# Altium PCB Control - 副本.PcbDoc
Units mm, origin at the board's own origin, x right, y up, seen from the top; angles counter-clockwise.
Board outline 140 x 70 mm, 2 copper layers (Top Layer, Bottom Layer); 25 components, 42 nets, 140 pads, 76 vias.
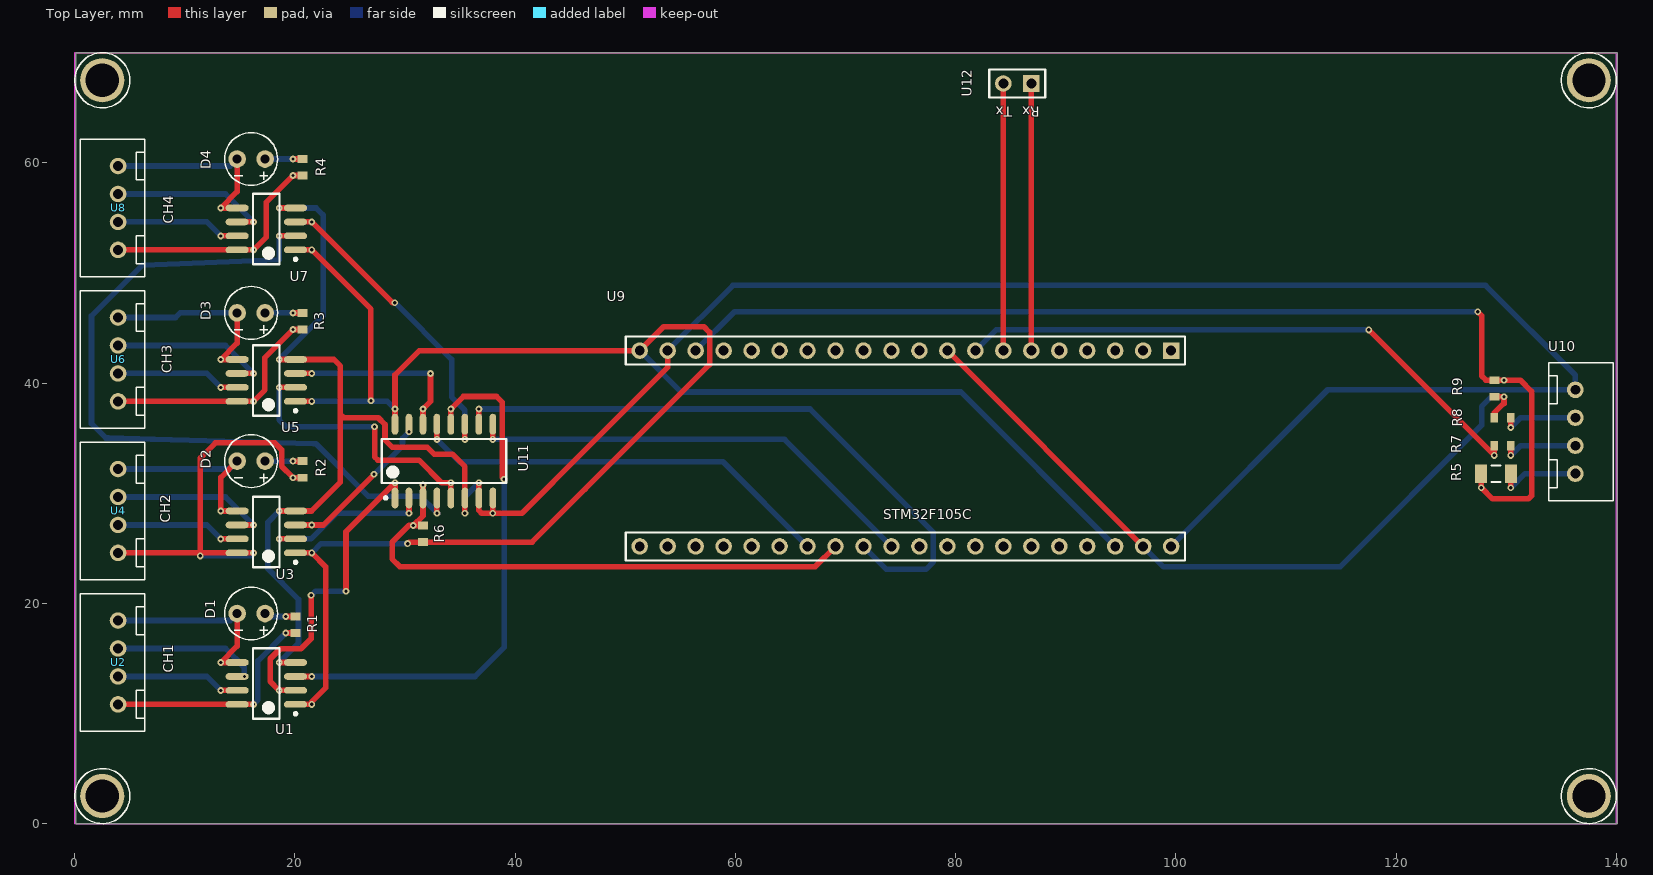
[diagram p0: Top Layer view]
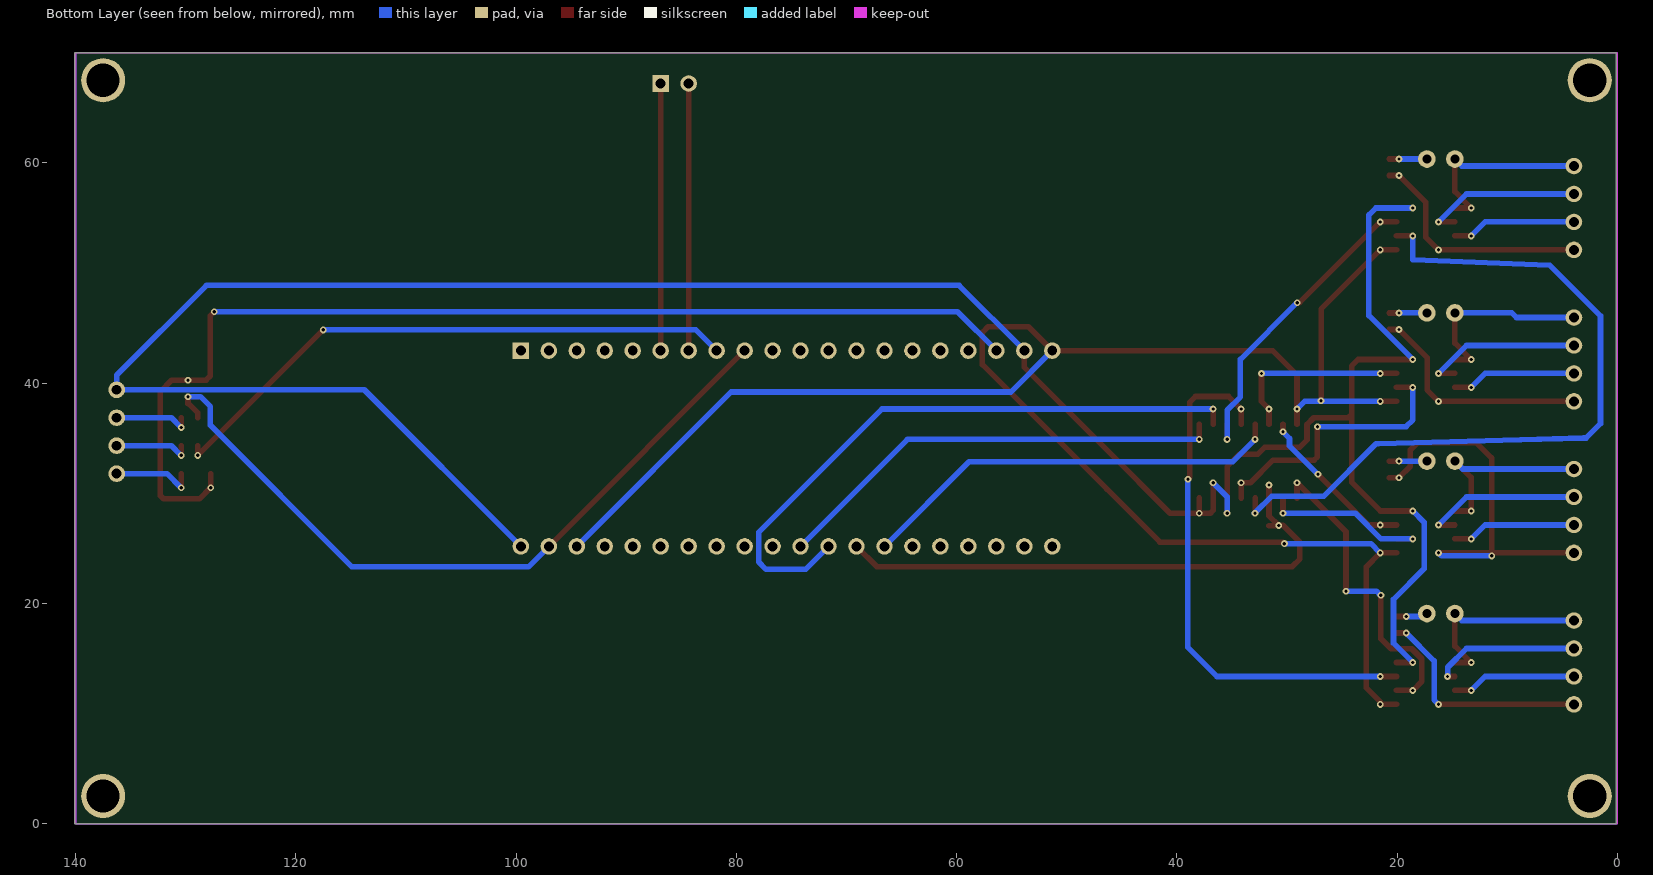
[diagram p1: Bottom Layer view, seen from below]

## Layer stack, top to bottom
Top Solder: solder mask 0.0102, Solder Resist, Dk 3.5
Top Layer: signal copper 0.0356
Dielectric 1: dielectric 0.32, FR-4, Dk 4.8
Bottom Layer: signal copper 0.0356
Bottom Solder: solder mask 0.0102, Solder Resist, Dk 3.5

## Board outline
140.081,70 140.081,0 0.081,0 0.081,70

## Design rules (kind name [scope] priority, off if disabled: settings)
Clearance Clearance_1 [WithinRoom('RoomDefinition1') or   WithinRoom('RoomDefinition2') vs WithinRoom('RoomDefinition1') or   WithinRoom('RoomDefinition2')] p1: gap=0.254 ignorepadtopadclearanceinfootprint=TRUE
Clearance [Not( WithinRoom('RoomDefinition1')  or WithinRoom('RoomDefinition2') ) vs Not( WithinRoom('RoomDefinition1')  or WithinRoom('RoomDefinition2') )] p2: gap=1.016 ignorepadtopadclearanceinfootprint=TRUE except(0.254: Arc-THPad Arc-Hole Track-THPad Track-Hole SMDPad-THPad SMDPad-Hole THPad-THPad THPad-Via THPad-Fill THPad-Poly THPad-Region THPad-Text THPad-Hole Via-Hole Fill-Hole Poly-Hole Region-Hole Text-Hole)
ComponentClearance [All] p1: gap=0.254 collisioncheckmode=3 verticalgap=0 showdistances=TRUE donotcheckwithout3dbody=TRUE checkcomponentboundary=TRUE
HoleSize [All] p1: absolutevalues=TRUE maxlimit=3 minlimit=0.025 maxpercent=80.000 minpercent=20.000
PolygonConnect [All] p1: connectstyle=Relief reliefconductorwidth=0.254 reliefentries=4 polygonreliefangle="90 Angle" airgapwidth=0.254
RoomDefinition RoomDefinition2 [False] p1: confinementstyle=ConfineIn formatcopy=TRUE lockcomponents=FALSE outline 132.207,42.822 132.207,28.217 125.603,28.217 125.603,42.822
RoomDefinition RoomDefinition1 [False] p2: confinementstyle=ConfineIn formatcopy=TRUE lockcomponents=FALSE outline 46.355,65.047 46.355,5.611 8.763,5.611 8.763,65.047
RoutingVias [All] p1: holewidth=0.305 width=0.61 viastyle="Through Hole" minholewidth=0.305 minwidth=0.61 maxholewidth=0.305 maxwidth=0.61
SMDEntry [All] p1: side=FALSE corner=FALSE anyangle=FALSE
SolderMaskExpansion [All] p1: expansion=0.102 istentingtop=FALSE
SupplyNets "Schematic Supply Nets_1" [InNet('+5')] p1: voltage=0.000
SupplyNets "Schematic Supply Nets" [InNet('GND')] p2: voltage=0.000
Width [All] p1: maxlimit=1 minlimit=0.254 preferedwidth=0.508
28 further rules are at their usual default settings.

## Components (designator, comment, footprint, x,y, rotation, side; value= is the part's Value field where it differs from the comment)
D1 "CN0" LED 16.019,19.073 r270 top
D2 "CN2" LED 16.019,32.916 r270 top
D3 "CN1" LED 16.019,46.378 r270 top
D4 "CN3" LED 16.019,60.348 r270 top
R1 "" RESC1608L 20.049,18.057 r270 top value=1K
R2 "" RESC1608L 20.701,32.166 r270 top value=1K
R3 "" RESC1608L 20.701,45.616 r270 top value=1K
R4 "" RESC1608L 20.701,59.598 r270 top value=1K
R5 "500mA Fuse" RESC3216L 129.067,31.773 r180 top value=0R
R6 "" RESC1608L 31.623,26.312 r270 top value=10K
R7 "" RESC1608L 129.667,34.313 r0 top value=20R
R8 "" RESC1608L 129.667,36.853 r0 top value=20R
R9 "" RESC1608L 128.917,39.52 r270 top value=1.5K
U1 "ISO6721B" SOP127P636-8L 17.399,12.723 r180 top
U2 "SERIAL4P" X254-4P 3.937,14.628 r270 top
U3 "ISO6721B" SOP127P636-8L 17.399,26.481 r180 top
U4 "SERIAL4P" X254-4P 3.937,28.386 r270 top
U5 "ISO6721B" SOP127P636-8L 17.399,40.24 r180 top
U6 "SERIAL4P" X254-4P 3.937,42.145 r270 top
U7 "ISO6721B" SOP127P636-8L 17.399,53.998 r180 top
U8 "SERIAL4P" X254-4P 3.937,55.903 r270 top
U9 "STM32F103CCORE" STM32F103C 99.568,42.949 r180 top
U10 "USB-X254" X254-4P 136.271,35.583 r90 top
U11 "74HC4052" SOP127P762-16L 33.528,32.916 r90 top
U12 "CTLDBG" CTLDBG 86.868,67.206 r180 top

## Footprints (in the part's own frame and the unit in brackets; to place one, negate y for a bottom-side part, rotate by r counter-clockwise, add the part's x,y. Pads: shape width x height; smd on the part's side, far side on the other; paste and mask are expansions set on the pad)
CTLDBG [mm]
  rect 1.5x1.5 hole 0.9: 1(0,0)
  round 1.5 hole 0.9: 2(2.54,0)
  silkscreen extent -1.27,-1.27 3.81,1.27
LED [mm] "LED; 2 Leads"
  round 1.6 hole 0.8: 1(0,1.27) 2(0,-1.27)
  silkscreen extent -2.4,-2.4 2.4,2.4
RESC1608L [mm] "Chip Resistor, Body 1.6x0.8mm, IPC High Density"
  rect 0.7x0.9 smd: 1(-0.75,0) 2(0.75,0)
  body extent -0.85,-0.48 0.85,0.48, height 0.6
RESC3216L [mm] "Chip Resistor, Body 3.2x1.6mm, IPC High Density"
  rect 1.1x1.7 smd: 1(-1.35,0) 2(1.35,0)
  silkscreen extent -0.4,-0.75 0.4,0.75, body extent -1.68,-0.87 1.68,0.87, height 0.71
SOP127P636-8L [mm] "SOP, 8-Leads, Body 6x4.7mm, Pitch 1.27mm, IPC High Density"
  oval 2.1x0.6 smd: 1(-2.65,1.905) 2(-2.65,0.635) 3(-2.65,-0.635) 4(-2.65,-1.905) 5(2.65,-1.905) 6(2.65,-0.635) 7(2.65,0.635) 8(2.65,1.905)
  silkscreen extent -2.78,-3.2 1.2,3.2, body extent -2.36,-3.18 2.36,3.18, height 1.5
SOP127P762-16L [mm] "16-Pin Small Outline Package 1.27 mm Pitch"
  oval 1.9x0.6 smd: 1(-3.35,4.445) 2(-3.35,3.175) 3(-3.35,1.905) 4(-3.35,0.635) 5(-3.35,-0.635) 6(-3.35,-1.905) 7(-3.35,-3.175) 8(-3.35,-4.445) 9(3.35,-4.445) 10(3.35,-3.175) 11(3.35,-1.905) 12(3.35,-0.635) 13(3.35,0.635) 14(3.35,1.905) 15(3.35,3.175) 16(3.35,4.445)
  silkscreen extent -3.47,-5.65 2,5.65, body extent -2.85,-5.65 2.85,5.65, height 2.2
STM32F103C [mm] "STM32F103C Core"
  rect 1.5x1.5 hole 0.9: 1(0,0)
  round 1.5 hole 0.9: 2(2.54,0) 3(5.08,0) 4(7.62,0) 5(10.16,0) 6(12.7,0) 7(15.24,0) 8(17.78,0) 9(2.54,17.78) 9(20.32,0) 10(22.86,0) 11(25.4,0) 12(27.94,0) 13(30.48,0) 14(33.02,0) 15(35.56,0) 16(38.1,0) 17(40.64,0) 18(43.18,0) 19(45.72,0) 20(48.26,0) 21(48.26,17.78) 22(45.72,17.78) 23(43.18,17.78) 24(40.64,17.78) 25(38.1,17.78) 26(35.56,17.78) 27(33.02,17.78) 28(30.48,17.78) 29(27.94,17.78) 30(25.4,17.78) 31(22.86,17.78) 32(20.32,17.78) 33(17.78,17.78) 34(15.24,17.78) 35(12.7,17.78) 36(10.16,17.78) 37(7.62,17.78) 38(5.08,17.78) 40(0,17.78)
  silkscreen extent -1.27,-1.27 49.53,19.05
X254-4P [mm] "X254-4P"
  oval 1.5x1.524 hole 0.9: 1(-3.81,0) 2(-1.27,0) 3(1.27,0) 4(3.81,0)
  silkscreen extent -6.25,-3.43 6.25,2.41, body extent -6.22,-3.43 6.22,2.41, height 7

## Part data
D1 D2 D3 D4: library part LED1, "Typical RED GaAs LED", LatestRevisionDate=08-Jul-2005, LatestRevisionNote="Mech Layer 1 removed.", PackageDescription="LED; 2 Leads", PackageReference=LED-1, Published=8-Jun-2000, Publisher="Altium Limited"
R1 R2 R3 R4 R5 R6 R7 R8 R9: library part Res1, "Resistor", LatestRevisionDate=17-Jul-2002, LatestRevisionNote="Re-released for DXP Platform.", PackageDescription="Axial Device, Thru-Hole; 2 Leads; 0.3 in Pin Spacing", PackageReference=AXIAL-0.3, Published=8-Jun-2000, Publisher="Altium Limited"

## Free pads (board coordinates)
  round 4 hole 3 mask+0.102: 0(2.5,2.5) 0(2.5,67.5) 0(137.5,2.5) 0(137.5,67.5)

## Via types
v1: diameter 0.61, hole 0.305, Top Layer to Bottom Layer, 76 vias

## Nets (pads, with @x,y where several pads share a name; then routed paths per layer and width w, separated by ;. In a path a pad name is that pad's centre, name@x,y a point inside that pad or via, vN(x,y) a via of type N, cw(c..) or ccw(c..) an arc to the next point about the centre after c; other vN are vias at no path point)
3.3V: R6.2 U1.1 U3.1 U5.1 U7.1 U9.20 U9.38 U11.16 | length 176.3
  Top Layer w0.508: U1.1 v1(21.531,10.818) 21.531,11.072 22.784,12.325 22.784,23.323 v1(21.531,24.576) 20.803,24.576 U3.1 ; U5.1 v1(21.531,38.335) ; U7.1 v1(21.531,52.093) 26.899,46.725 v1(26.899,38.39) ; U11.16 v1(29.083,37.648) 29.083,40.739 31.293,42.949 U9.20 53.492,45.133 57.125,45.133 57.658,44.6 57.658,41.679 46.355,30.376 41.541,25.562 30.393,25.562 30.254,25.423 v1(30.226,25.423)
  Bottom Layer w0.508: v1(21.531,24.576) 22.378,25.423 v1(30.226,25.423) ; v1(21.531,38.335) 26.816,38.335 26.871,38.39 v1(26.899,38.39) ; v1@26.899,38.335 28.396,38.335 v1(29.083,37.648) ; U9.20 55.067,39.19 80.467,39.19 U9.38
+5: R5.2 R9.1 U9.18 | length 99.4
  Top Layer w0.508: v1(127.406,46.48) 127.762,46.124 127.762,40.663 128.155,40.27 R9.1 v1(129.799,40.27) 131.275,40.27 132.309,39.236 132.309,29.785 132.207,29.683 132.011,29.487 128.753,29.487 127.749,30.491 v1(127.717,30.491) R5.2
  Bottom Layer w0.508: U9.18 59.919,46.48 v1(127.406,46.48)
DRX: U9.7 U12.2 | length 24.3
  Top Layer w0.508: U9.7 U12.2
DTX: U9.6 U12.1 | length 24.3
  Top Layer w0.508: U12.1@86.741,67.206 86.868,67.079 U9.6
GND: U1.4 U3.4 U5.4 U7.4 U9.19 U9.40 U10.4 U11.6 U11.7 U11.8 | length 243
  Top Layer w0.508: v1(18.567,14.628) U1.4 ; v1(18.567,28.386) U3.4 21.505,28.386 24.13,31.011 24.13,37.158 ; v1(18.567,42.145) U5.4 23.529,42.145 24.13,41.543 24.13,37.158 ; v1(18.567,55.903) U7.4 ; v1(35.433,28.184) U11.6 35.433,32.408 34.29,33.551 32.638,33.551 32.003,34.186 28.829,34.186 28.176,34.839 28.176,36.243 27.566,36.853 24.435,36.853 24.13,37.158 ; v1(36.703,30.948) U11.7 36.703,28.438 36.957,28.184 v1(37.973,28.184) ; U11.8 v1(37.973,28.184) ; U9.19 53.848,41.425 46.355,33.932 40.596,28.173 40.176,28.173 40.165,28.184 v1(37.973,28.184)
  Bottom Layer w0.508: v1(18.567,14.628) 20.32,16.381 20.32,20.354 17.526,23.148 17.526,27.345 v1(18.567,28.386) ; v1(18.567,42.145) 22.555,46.133 22.555,55.268 21.92,55.903 v1(18.567,55.903) ; v1(35.433,28.184) 35.433,29.678 v1(36.703,30.948) ; U9.19 59.766,48.867 128.118,48.867 136.271,40.714 U10.4 113.792,39.393 U9.40
NetD1_1: D1.1 R1.1 | length 2.9
  Top Layer w0.508: v1(19.167,18.807) R1.1
  Bottom Layer w0.508: D1.1 17.555,18.807 v1(19.167,18.807)
NetD1_2: D1.2 U1.5 U2.1 | length 17.6
  Top Layer w0.508: U1.5 v1(13.267,14.628) 14.749,16.11 D1.2
  Bottom Layer w0.508: U2.1 14.114,18.438 D1.2
NetD2_1: D2.1 R2.1 | length 3.4
  Top Layer w0.508: v1(19.819,32.916) R2.1
  Bottom Layer w0.508: D2.1 v1(19.819,32.916)
NetD2_2: D2.2 U3.5 U4.1 | length 17.7
  Top Layer w0.508: U3.5 v1(13.267,28.386) 13.267,31.434 D2.2
  Bottom Layer w0.508: U4.1 14.029,32.196 D2.2
NetD3_1: D3.1 R3.1 | length 3.4
  Top Layer w0.508: v1(19.819,46.366) R3.1
  Bottom Layer w0.508: D3.1 19.807,46.378 v1(19.819,46.366)
NetD3_2: D3.2 U5.5 U6.1 | length 17.3
  Top Layer w0.508: U5.5 v1(13.267,42.145) 14.749,43.627 D3.2
  Bottom Layer w0.508: U6.1 9.152,45.955 9.576,46.378 D3.2
NetD4_1: D4.1 R4.1 | length 3.4
  Top Layer w0.508: v1(19.819,60.348) R4.1
  Bottom Layer w0.508: D4.1 v1(19.819,60.348)
NetD4_2: D4.2 U7.5 U8.1 | length 17.6
  Top Layer w0.508: U7.5 v1(13.267,55.903) 14.749,57.385 D4.2
  Bottom Layer w0.508: U8.1 14.114,59.713 D4.2
NetR1_2: R1.2 U1.8 U2.4 | length 20.9
  Top Layer w0.508: U2.4 U1.8 v1(16.231,10.818) ; v1(19.167,17.307) R1.2
  Bottom Layer w0.508: v1(16.231,10.818) 16.637,11.224 16.637,14.777 v1(19.167,17.307)
NetR2_2: R2.2 U3.8 U4.4 | length 38.2
  Top Layer w0.508: U4.4 v1@11.405,24.576 ; v1(11.405,24.305) v1@11.405,24.576 ; v1(16.231,24.576) U3.8 v1@11.405,24.576 ; R2.2@20.701,31.416 v1(19.819,31.416) 18.796,32.439 18.796,33.932 18.161,34.567 12.776,34.567 11.405,33.195 v1@11.405,24.576
  Bottom Layer w0.508: v1(11.405,24.305) 15.96,24.305 v1(16.231,24.576)
NetR3_2: R3.2 U5.8 U6.4 | length 21.2
  Top Layer w0.508: U6.4 U5.8 v1(16.231,38.335) 17.272,39.376 17.272,42.319 v1(19.819,44.866) R3.2
NetR4_2: R4.2 U7.8 U8.4 | length 21.4
  Top Layer w0.508: U8.4 U7.8 v1(16.231,52.093) 17.399,53.261 17.399,56.428 v1(19.819,58.848) R4.2@20.701,58.848
NetR5_1: R5.1 U10.1 | length 7.7
  Top Layer w0.508: v1(130.417,30.491) R5.1
  Bottom Layer w0.508: v1(130.417,30.491) 131.699,31.773 U10.1
NetR7_2: R7.2 U10.2 | length 7.1
  Top Layer w0.508: v1(130.417,33.431) R7.2
  Bottom Layer w0.508: v1(130.417,33.431) 131.299,34.313 U10.2
NetR8_2: R8.2 U10.3 | length 7.1
  Top Layer w0.508: v1(130.417,35.971) R8.2
  Bottom Layer w0.508: v1(130.417,35.971) 131.299,36.853 U10.3
NetU1_6: U1.6 U2.2 | length 13.7
  Top Layer w0.508: U1.6 v1(15.418,13.358)
  Bottom Layer w0.508: U2.2 13.691,15.898 15.398,14.191 15.398,13.378 v1(15.418,13.358)
NetU1_7: U1.7 U2.3 | length 11.3
  Top Layer w0.508: v1(13.267,12.088) U1.7
  Bottom Layer w0.508: U2.3 11.997,13.358 v1(13.267,12.088)
NetU3_6: U3.6 U4.2 | length 14.8
  Top Layer w0.508: U3.6 v1(16.231,27.116)
  Bottom Layer w0.508: U4.2 13.691,29.656 v1(16.231,27.116)
NetU3_7: U3.7 U4.3 | length 11.3
  Top Layer w0.508: v1(13.267,25.846) U3.7
  Bottom Layer w0.508: U4.3 11.997,27.116 v1(13.267,25.846)
NetU5_6: U5.6 U6.2 | length 14.8
  Top Layer w0.508: U5.6 v1(16.231,40.875)
  Bottom Layer w0.508: U6.2 13.691,43.415 v1(16.231,40.875)
NetU5_7: U5.7 U6.3 | length 11.3
  Top Layer w0.508: v1(13.267,39.605) U5.7
  Bottom Layer w0.508: U6.3 11.997,40.875 v1(13.267,39.605)
NetU7_6: U7.6 U8.2 | length 14.8
  Top Layer w0.508: U7.6 v1(16.231,54.633)
  Bottom Layer w0.508: U8.2 13.691,57.173 v1(16.231,54.633)
NetU7_7: U7.7 U8.3 | length 11.3
  Top Layer w0.508: v1(13.267,53.363) U7.7
  Bottom Layer w0.508: U8.3 11.997,54.633 v1(13.267,53.363)
PA11: R7.1 U9.8 | length 53.5
  Top Layer w0.508: v1(117.519,44.829) v1(128.917,33.431) R7.1
  Bottom Layer w0.508: U9.8 83.668,44.829 v1(117.519,44.829)
PA12: R8.1 R9.2 U9.9 | length 69.3
  Top Layer w0.508: U9.9@79.248,42.949 U9.9@97.028,25.169 ; R8.1 128.917,37.322 129.71,38.115 129.799,38.115 v1(129.799,38.77) R9.2
  Bottom Layer w0.508: U9.9@97.028,25.169 98.882,23.315 114.91,23.315 127.762,36.167 127.762,37.869 128.663,38.77 v1(129.799,38.77)
R0: U1.2 U11.1 | length 29.5
  Top Layer w0.508: U1.2 v1(18.567,12.088) 17.754,12.901 17.754,14.965 18.665,15.876 20.552,15.876 21.463,16.787 v1(21.463,20.724) ; v1(24.638,21.105) 24.638,26.503 v1(29.083,30.948) U11.1
  Bottom Layer w0.508: v1(21.463,20.724) 21.491,20.724 21.872,21.105 v1(24.638,21.105)
R1: U5.2 U11.5 | length 25.4
  Top Layer w0.508: v1(18.567,39.605) U5.2 ; v1(27.229,36.04) 27.229,33.302 27.526,33.004 31.247,33.004 33.304,30.948 v1(34.163,30.948) U11.5
  Bottom Layer w0.508: v1(18.567,39.605) 18.567,36.65 19.177,36.04 v1(27.229,36.04)
R2: U3.2 U11.2 | length 15.6
  Top Layer w0.508: v1(18.567,25.846) U3.2 ; v1(30.353,28.184) U11.2
  Bottom Layer w0.508: v1(18.567,25.846) 21.444,25.846 23.782,28.184 v1(30.353,28.184)
R3: U7.2 U11.4 | length 68.4
  Top Layer w0.508: v1(18.567,53.363) U7.2 ; v1(32.893,28.184) U11.4
  Bottom Layer w0.508: v1(18.567,53.363) 18.567,51.204 6.121,50.696 1.524,46.099 1.524,36.322 2.686,35.16 2.83,35.016 3.032,35.011 8.763,34.855 21.688,34.503 21.89,34.498 22.033,34.355 26.672,29.716 31.394,29.716 32.842,28.268 32.842,28.263 32.904,28.2 32.91,28.2 32.91,28.195 32.94,28.164 v1@32.946,28.164
RX: R6.1 U9.28 U11.3 | length 50.3
  Top Layer w0.508: v1(30.741,27.062) R6.1 ; v1(31.623,30.75) 31.623,27.944 30.765,27.086 30.365,27.086 28.829,25.55 28.829,24.026 29.533,23.322 67.241,23.322 U9.28
S0: U9.29 U11.10 | length 57.5
  Top Layer w0.508: U11.10 v1(36.703,37.648)
  Bottom Layer w0.508: v1(36.703,37.648) 66.769,37.648 77.978,26.439 77.978,23.772 77.292,23.086 73.711,23.086 U9.29
S1: U9.30 U11.9 | length 41.6
  Top Layer w0.508: v1(37.973,34.884) U11.9
  Bottom Layer w0.508: v1(37.973,34.884) 64.453,34.884 U9.30
T0: U1.3 U11.12 | length 49.1
  Top Layer w0.508: U1.3 v1(21.531,13.358) ; U11.12 v1(34.163,37.648) 35.298,38.783 38.303,38.783 38.811,38.275 38.811,31.443 v1(38.989,31.265)
  Bottom Layer w0.508: v1(21.531,13.358) 36.345,13.358 38.989,16.002 v1(38.989,31.265)
T1: U5.3 U11.14 | length 17.2
  Top Layer w0.508: U5.3 v1(21.531,40.875) ; U11.14 v1(31.623,37.648) 32.309,38.334 v1(32.309,40.875)
  Bottom Layer w0.508: v1(21.531,40.875) v1(32.309,40.875)
T2: U3.3 U11.15 | length 14.9
  Top Layer w0.508: U3.3 v1(21.531,27.116) 22.585,27.116 v1(27.178,31.709) ; v1(30.353,35.583) U11.15
  Bottom Layer w0.508: v1(27.178,31.709) 29.769,34.3 29.769,34.971 30.353,35.556 v1(30.353,35.583)
T3: U7.3 U11.11 | length 28.5
  Top Layer w0.508: U7.3 v1(21.531,54.633) 28.859,47.305 v1(29.071,47.305) ; v1(35.433,34.884) U11.11
  Bottom Layer w0.508: v1(29.071,47.305) 34.227,42.149 34.227,38.743 35.433,37.536 v1(35.433,34.884)
TX: U9.27 U11.13 | length 39.1
  Top Layer w0.508: v1(32.893,34.884) U11.13
  Bottom Layer w0.508: v1(32.893,34.884) 34.912,32.865 58.852,32.865 U9.27
pads on no net: U9.1 U9.2 U9.3 U9.4 U9.5 U9.10 U9.11 U9.12 U9.13 U9.14 U9.15 U9.16 U9.17 U9.21 U9.22 U9.23 U9.24 U9.25 U9.26 U9.31 U9.32 U9.33 U9.34 U9.35 U9.36 U9.37

## Polygon pours and split planes (outlines as drawn)
GND on Top Layer "NONET_L01_P000" (solid, remove dead copper, shelved, pour order 0): 0,0 0,70 140,70 140,0
GND on Bottom Layer "NONET_L02_P001" (solid, shelved, pour order 1): 0,0 0,70 140,70 140,0

## Keep-outs
Keep-Out Layer:
  lines w0.127: 0,0 0,70 140,70 140,0 0,0

## Other copper
Multi-Layer:
  pour cut-out: 46.482,65.047 46.482,5.611 8.763,5.611 8.763,65.047

## Silkscreen, mask and mechanical layers (free items; w line width, h text height)
Top Overlay:
  circle w0.127: c137.5,67.5 r2.5
  circle w0.127: c2.5,67.5 r2.5
  circle w0.127: c137.5,2.5 r2.5
  circle w0.127: c2.5,2.5 r2.5
  text "CH4" at 9.255,54.483 h1.52 r90
  text "CH3" at 9.128,40.894 h1.52 r90
  text "CH2" at 9.001,27.305 h1.52 r90
  text "CH1" at 9.255,13.716 h1.52 r90
Mechanical 15:
  lines w0.254: 93.599,4.953 131.318,4.953 131.318,64.389 93.599,64.389 93.599,4.953

## Text inside footprints (layer, text, board x,y; h text height)
U9: Top Overlay "STM32F105C" at 73.406,27.321 h1.52
U12: Top Overlay "Rx" at 87.63,65.428 h1.52 r180; Top Overlay "Tx" at 85.159,65.426 h1.52 r180